# Altium PCB Carte Oeil.PcbDoc
Units mm, origin at the board's own origin, x right, y up, seen from the top; angles counter-clockwise.
Board outline 200 x 200 mm, 2 copper layers (Top Layer, Bottom Layer); 288 components, 75 nets, 674 pads, 16 vias.
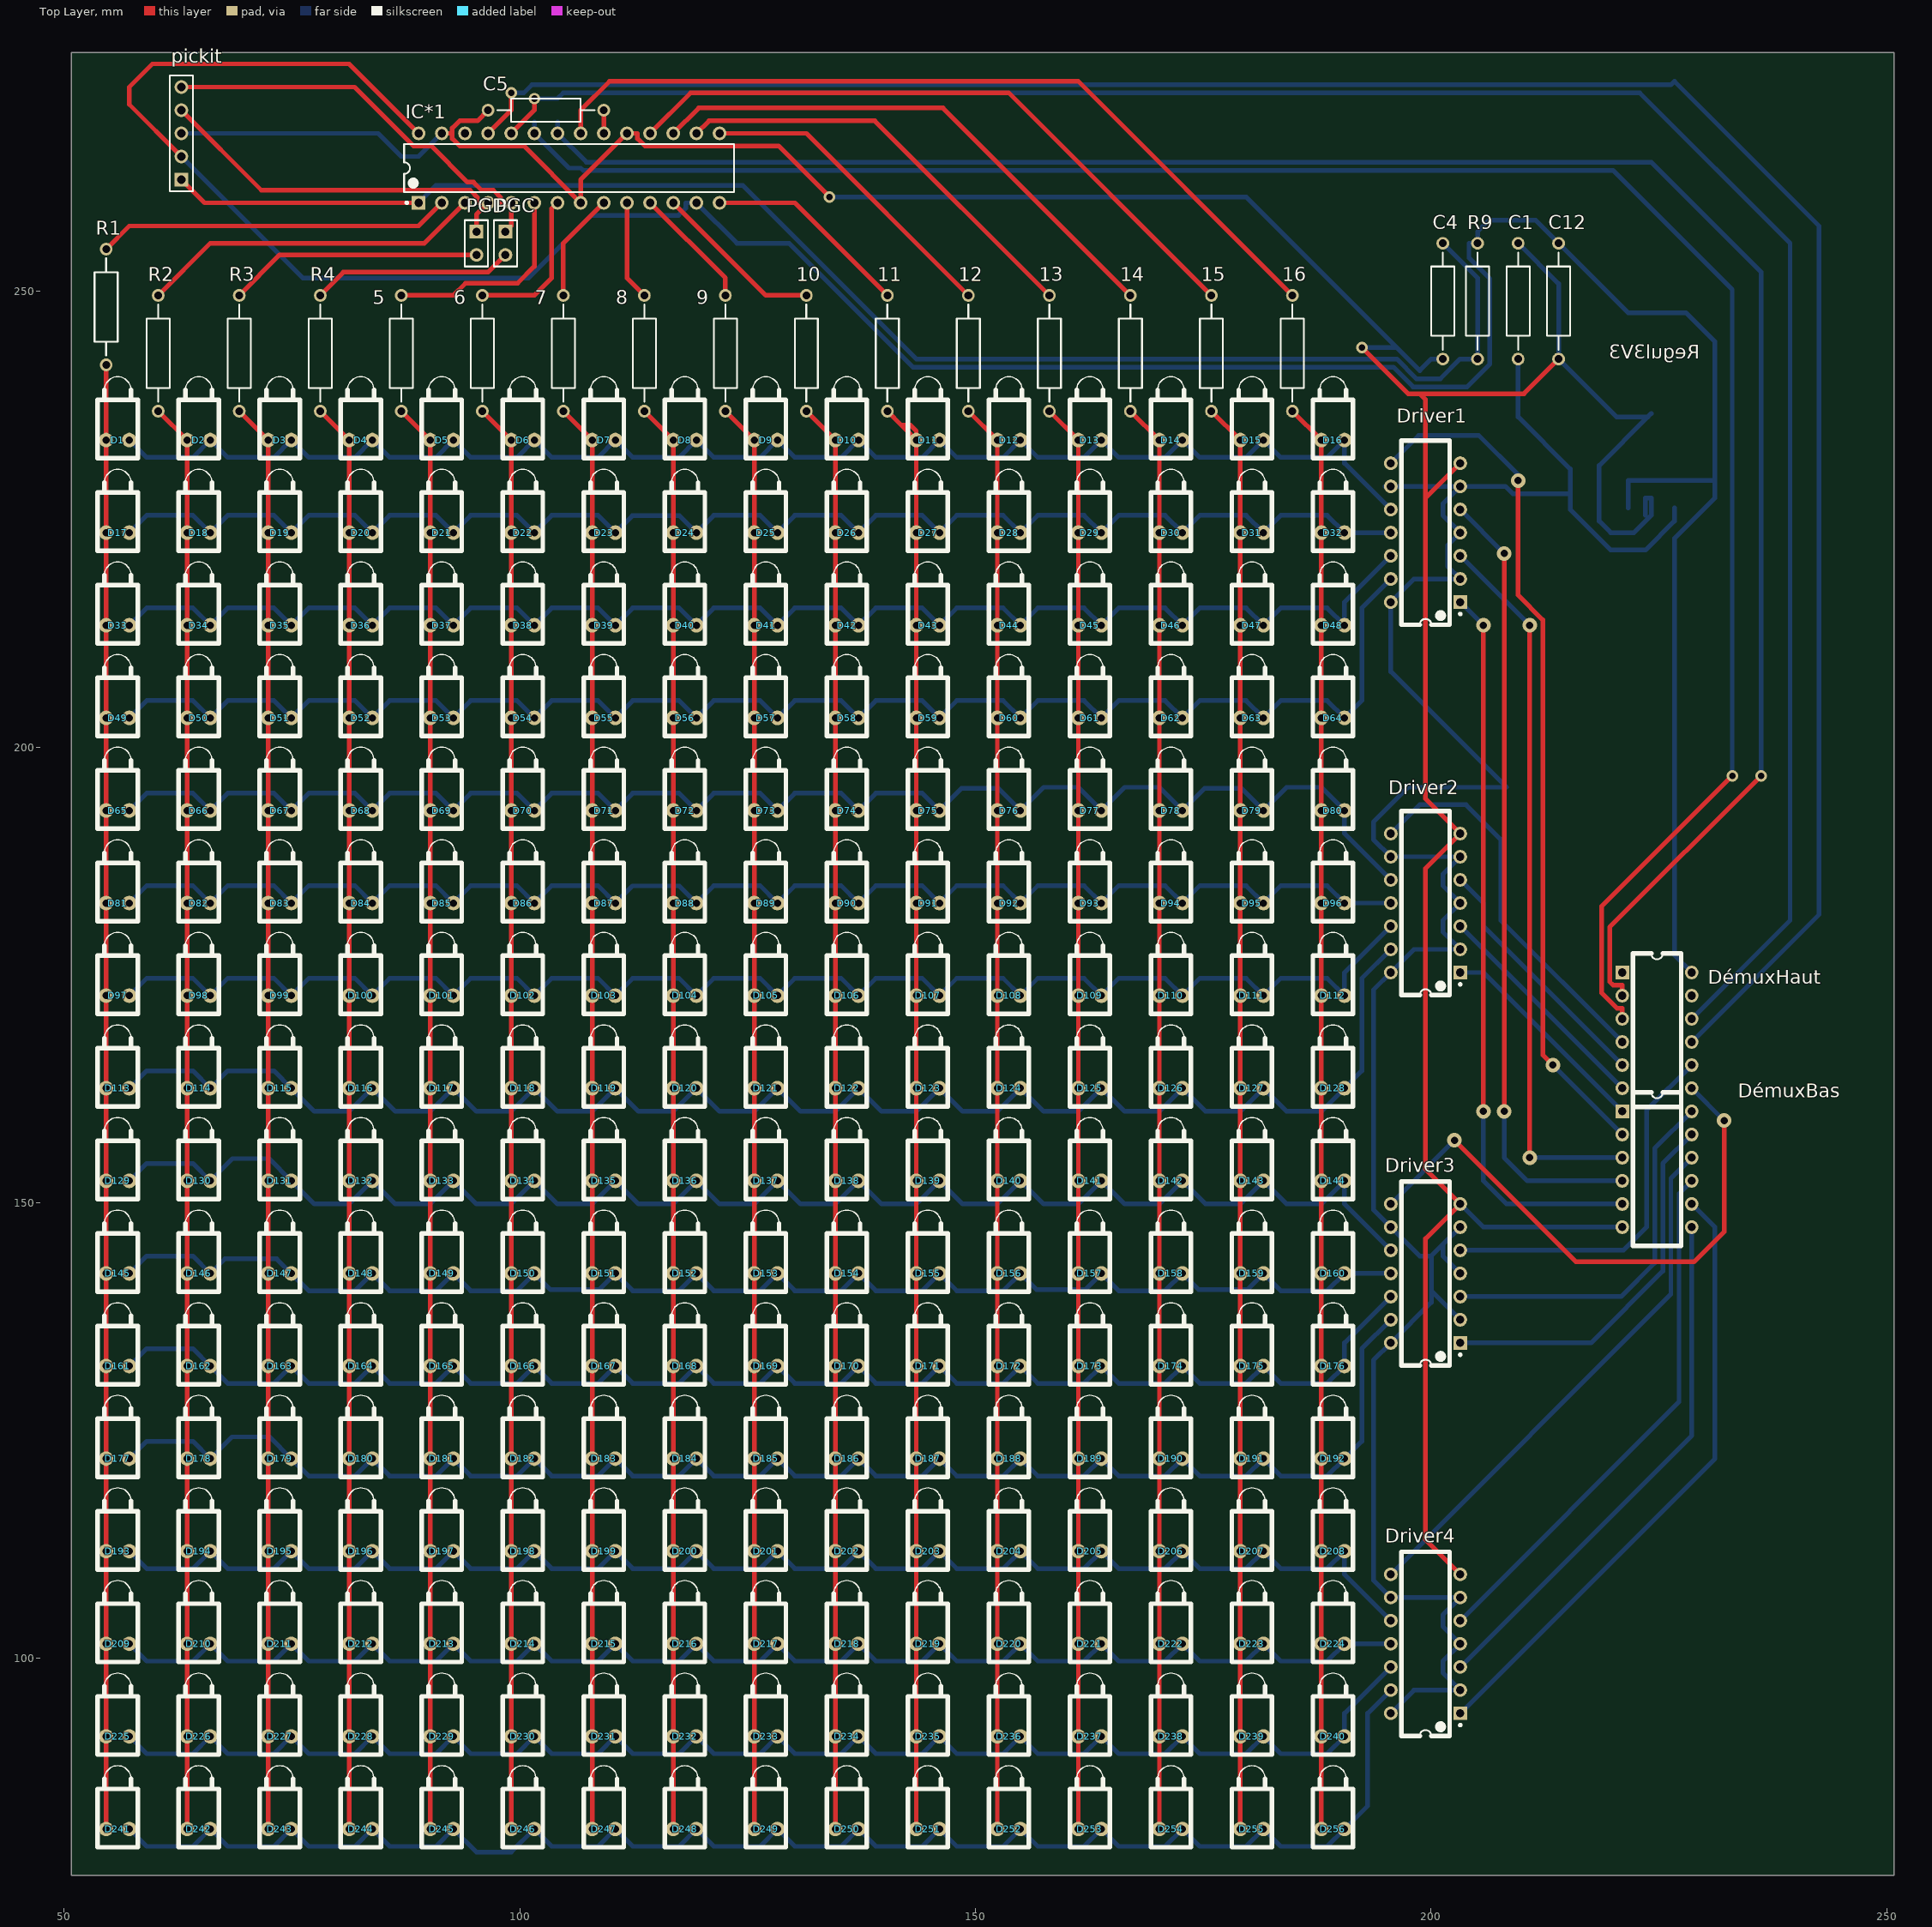
[diagram p0: Top Layer view]
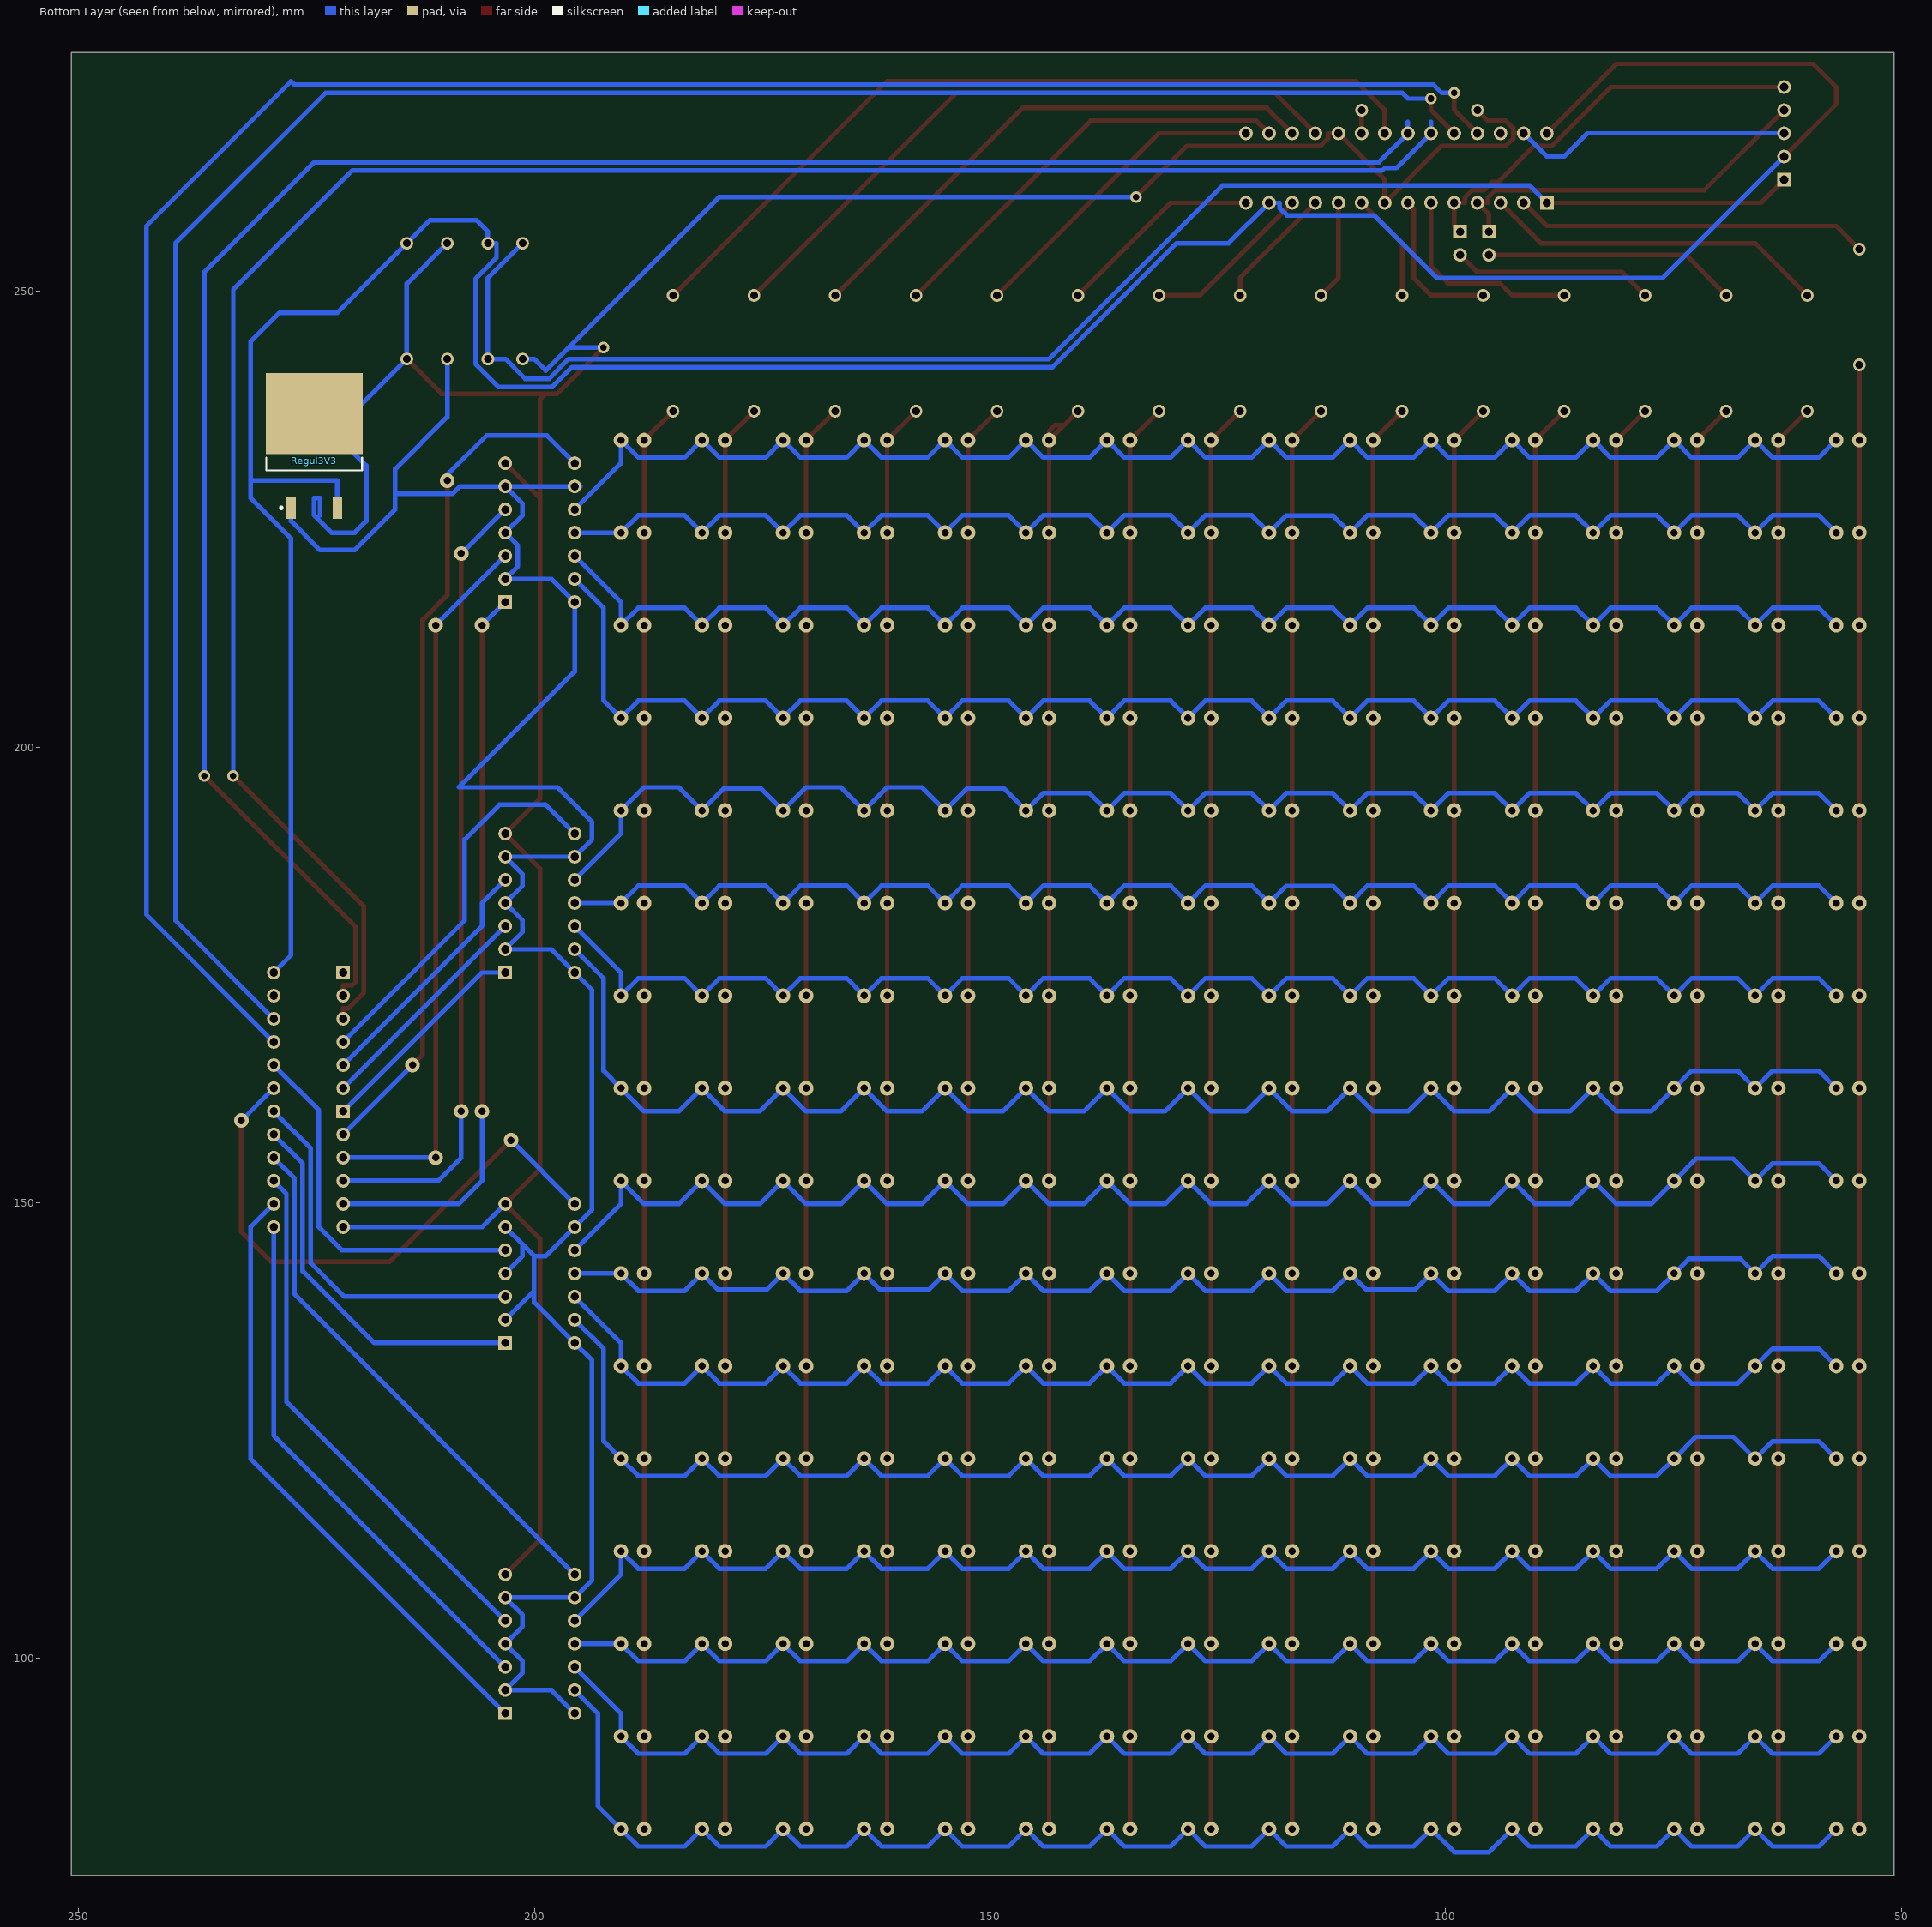
[diagram p1: Bottom Layer view, seen from below]

## Layer stack, top to bottom
Top Solder: solder mask 0.0102, Solder Resist, Dk 3.5
Top Layer: signal copper 0.0356
Dielectric 1: dielectric 0.32, FR-4, Dk 4.8
Bottom Layer: signal copper 0.0356
Bottom Solder: solder mask 0.0102, Solder Resist, Dk 3.5

## Board outline
50.8,76.2 250.8,76.2 250.8,276.2 50.8,276.2

## Design rules (kind name [scope] priority, off if disabled: settings)
Clearance [All] p1: gap=0.381
PolygonConnect [All] p1: connectstyle=Relief reliefconductorwidth=0.254 reliefentries=4 polygonreliefangle="90 Angle" airgapwidth=0.254
RoutingVias [All] p1: holewidth=0.8 width=1.6 viastyle="Through Hole" minholewidth=0.711 minwidth=1.27 maxholewidth=0.711 maxwidth=1.27
SolderMaskExpansion [All] p1: expansion=0.102
UnpouredPolygon [All] p1: allowunpoured=FALSE
Width [All] p1: maxlimit=0.508 minlimit=0.508 preferedwidth=0.508
29 further rules are at their usual default settings.

## Components (designator, comment, footprint, x,y, rotation, side; value= is the part's Value field where it differs from the comment)
5 "1kohm" AXIAL-0.5 86.995,243.205 r90 top
6 "1kohm" AXIAL-0.5 95.885,243.205 r90 top
7 "1kohm" AXIAL-0.5 104.775,243.205 r90 top
8 "1kohm" AXIAL-0.5 113.665,243.205 r90 top
9 "1kohm" AXIAL-0.5 122.555,243.205 r90 top
10 "1kohm" AXIAL-0.5 131.445,243.205 r90 top
11 "1kohm" AXIAL-0.5 140.335,243.205 r90 top
12 "1kohm" AXIAL-0.5 149.225,243.205 r90 top
13 "1kohm" AXIAL-0.5 158.115,243.205 r90 top
14 "1kohm" AXIAL-0.5 167.005,243.205 r90 top
15 "1kohm" AXIAL-0.5 175.895,243.205 r90 top
16 "1kohm" AXIAL-0.5 184.785,243.205 r90 top
C1 "Cap2" AXIAL-0.5 209.55,248.92 r90 top
C4 "100nF" AXIAL-0.5 201.295,248.92 r90 top
C5 "10uF" AXIAL-0.5 102.87,269.875 r180 top
C12 "Cap2" AXIAL-0.5 213.995,248.92 r90 top
D1 "LED1" LED-1 55.88,233.68 r90 top
D2 "LED1" LED-1 64.77,233.68 r90 top
D3 "LED1" LED-1 73.66,233.68 r90 top
D4 "LED1" LED-1 82.55,233.68 r90 top
D5 "LED1" LED-1 91.44,233.68 r90 top
D6 "LED1" LED-1 100.33,233.68 r90 top
D7 "LED1" LED-1 109.22,233.68 r90 top
D8 "LED1" LED-1 118.11,233.68 r90 top
D9 "LED1" LED-1 127,233.68 r90 top
D10 "LED1" LED-1 135.89,233.68 r90 top
D11 "LED1" LED-1 144.78,233.68 r90 top
D12 "LED1" LED-1 153.67,233.68 r90 top
D13 "LED1" LED-1 162.56,233.68 r90 top
D14 "LED1" LED-1 171.45,233.68 r90 top locked
D15 "LED1" LED-1 180.34,233.68 r90 top
D16 "LED1" LED-1 189.23,233.68 r90 top locked
D17 "LED1" LED-1 55.88,223.52 r90 top
D18 "LED1" LED-1 64.77,223.52 r90 top
D19 "LED1" LED-1 73.66,223.52 r90 top
D20 "LED1" LED-1 82.55,223.52 r90 top
D21 "LED1" LED-1 91.44,223.52 r90 top
D22 "LED1" LED-1 100.33,223.52 r90 top
D23 "LED1" LED-1 109.22,223.52 r90 top
D24 "LED1" LED-1 118.11,223.52 r90 top
D25 "LED1" LED-1 127,223.52 r90 top
D26 "LED1" LED-1 135.89,223.52 r90 top
D27 "LED1" LED-1 144.78,223.52 r90 top
D28 "LED1" LED-1 153.67,223.52 r90 top
D29 "LED1" LED-1 162.56,223.52 r90 top
D30 "LED1" LED-1 171.45,223.52 r90 top
D31 "LED1" LED-1 180.34,223.52 r90 top locked
D32 "LED1" LED-1 189.23,223.52 r90 top
D33 "LED1" LED-1 55.88,213.36 r90 top
D34 "LED1" LED-1 64.77,213.36 r90 top
D35 "LED1" LED-1 73.66,213.36 r90 top
D36 "LED1" LED-1 82.55,213.36 r90 top
D37 "LED1" LED-1 91.44,213.36 r90 top
D38 "LED1" LED-1 100.33,213.36 r90 top
D39 "LED1" LED-1 109.22,213.36 r90 top
D40 "LED1" LED-1 118.11,213.36 r90 top
D41 "LED1" LED-1 127,213.36 r90 top
D42 "LED1" LED-1 135.89,213.36 r90 top
D43 "LED1" LED-1 144.78,213.36 r90 top
D44 "LED1" LED-1 153.67,213.36 r90 top
D45 "LED1" LED-1 162.56,213.36 r90 top
D46 "LED1" LED-1 171.45,213.36 r90 top
D47 "LED1" LED-1 180.34,213.36 r90 top
D48 "LED1" LED-1 189.23,213.36 r90 top
D49 "LED1" LED-1 55.88,203.2 r90 top
D50 "LED1" LED-1 64.77,203.2 r90 top
D51 "LED1" LED-1 73.66,203.2 r90 top
D52 "LED1" LED-1 82.55,203.2 r90 top
D53 "LED1" LED-1 91.44,203.2 r90 top
D54 "LED1" LED-1 100.33,203.2 r90 top
D55 "LED1" LED-1 109.22,203.2 r90 top
D56 "LED1" LED-1 118.11,203.2 r90 top
D57 "LED1" LED-1 127,203.2 r90 top
D58 "LED1" LED-1 135.89,203.2 r90 top
D59 "LED1" LED-1 144.78,203.2 r90 top
D60 "LED1" LED-1 153.67,203.2 r90 top
D61 "LED1" LED-1 162.56,203.2 r90 top
D62 "LED1" LED-1 171.45,203.2 r90 top
D63 "LED1" LED-1 180.34,203.2 r90 top
D64 "LED1" LED-1 189.23,203.2 r90 top
D65 "LED1" LED-1 55.88,193.04 r90 top
D66 "LED1" LED-1 64.77,193.04 r90 top
D67 "LED1" LED-1 73.66,193.04 r90 top
D68 "LED1" LED-1 82.55,193.04 r90 top
D69 "LED1" LED-1 91.44,193.04 r90 top
D70 "LED1" LED-1 100.33,193.04 r90 top
D71 "LED1" LED-1 109.22,193.04 r90 top
D72 "LED1" LED-1 118.11,193.04 r90 top
D73 "LED1" LED-1 127,193.04 r90 top
D74 "LED1" LED-1 135.89,193.04 r90 top
D75 "LED1" LED-1 144.78,193.04 r90 top
D76 "LED1" LED-1 153.67,193.04 r90 top
D77 "LED1" LED-1 162.56,193.04 r90 top
D78 "LED1" LED-1 171.45,193.04 r90 top
D79 "LED1" LED-1 180.34,193.04 r90 top
D80 "LED1" LED-1 189.23,193.04 r90 top
D81 "LED1" LED-1 55.88,182.88 r90 top
D82 "LED1" LED-1 64.77,182.88 r90 top
D83 "LED1" LED-1 73.66,182.88 r90 top
D84 "LED1" LED-1 82.55,182.88 r90 top
D85 "LED1" LED-1 91.44,182.88 r90 top
D86 "LED1" LED-1 100.33,182.88 r90 top
D87 "LED1" LED-1 109.22,182.88 r90 top
D88 "LED1" LED-1 118.11,182.88 r90 top
D89 "LED1" LED-1 127,182.88 r90 top
D90 "LED1" LED-1 135.89,182.88 r90 top
D91 "LED1" LED-1 144.78,182.88 r90 top
D92 "LED1" LED-1 153.67,182.88 r90 top
D93 "LED1" LED-1 162.56,182.88 r90 top
D94 "LED1" LED-1 171.45,182.88 r90 top
D95 "LED1" LED-1 180.34,182.88 r90 top
D96 "LED1" LED-1 189.23,182.88 r90 top
D97 "LED1" LED-1 55.88,172.72 r90 top
D98 "LED1" LED-1 64.77,172.72 r90 top
D99 "LED1" LED-1 73.66,172.72 r90 top
D100 "LED1" LED-1 82.55,172.72 r90 top
D101 "LED1" LED-1 91.44,172.72 r90 top
D102 "LED1" LED-1 100.33,172.72 r90 top
D103 "LED1" LED-1 109.22,172.72 r90 top
D104 "LED1" LED-1 118.11,172.72 r90 top
D105 "LED1" LED-1 127,172.72 r90 top
D106 "LED1" LED-1 135.89,172.72 r90 top
D107 "LED1" LED-1 144.78,172.72 r90 top
D108 "LED1" LED-1 153.67,172.72 r90 top
D109 "LED1" LED-1 162.56,172.72 r90 top
D110 "LED1" LED-1 171.45,172.72 r90 top
D111 "LED1" LED-1 180.34,172.72 r90 top
D112 "LED1" LED-1 189.23,172.72 r90 top
D113 "LED1" LED-1 55.88,162.56 r90 top
D114 "LED1" LED-1 64.77,162.56 r90 top
D115 "LED1" LED-1 73.66,162.56 r90 top
D116 "LED1" LED-1 82.55,162.56 r90 top
D117 "LED1" LED-1 91.44,162.56 r90 top
D118 "LED1" LED-1 100.33,162.56 r90 top
D119 "LED1" LED-1 109.22,162.56 r90 top
D120 "LED1" LED-1 118.11,162.56 r90 top
D121 "LED1" LED-1 127,162.56 r90 top
D122 "LED1" LED-1 135.89,162.56 r90 top
D123 "LED1" LED-1 144.78,162.56 r90 top
D124 "LED1" LED-1 153.67,162.56 r90 top
D125 "LED1" LED-1 162.56,162.56 r90 top
D126 "LED1" LED-1 171.45,162.56 r90 top
D127 "LED1" LED-1 180.34,162.56 r90 top
D128 "LED1" LED-1 189.23,162.56 r90 top
D129 "LED1" LED-1 55.88,152.4 r90 top
D130 "LED1" LED-1 64.77,152.4 r90 top
D131 "LED1" LED-1 73.66,152.4 r90 top
D132 "LED1" LED-1 82.55,152.4 r90 top
D133 "LED1" LED-1 91.44,152.4 r90 top
D134 "LED1" LED-1 100.33,152.4 r90 top
D135 "LED1" LED-1 109.22,152.4 r90 top
D136 "LED1" LED-1 118.11,152.4 r90 top
D137 "LED1" LED-1 127,152.4 r90 top
D138 "LED1" LED-1 135.89,152.4 r90 top
D139 "LED1" LED-1 144.78,152.4 r90 top
D140 "LED1" LED-1 153.67,152.4 r90 top
D141 "LED1" LED-1 162.56,152.4 r90 top
D142 "LED1" LED-1 171.45,152.4 r90 top
D143 "LED1" LED-1 180.34,152.4 r90 top
D144 "LED1" LED-1 189.23,152.4 r90 top
D145 "LED1" LED-1 55.88,142.24 r90 top
D146 "LED1" LED-1 64.77,142.24 r90 top
D147 "LED1" LED-1 73.66,142.24 r90 top
D148 "LED1" LED-1 82.55,142.24 r90 top
D149 "LED1" LED-1 91.44,142.24 r90 top
D150 "LED1" LED-1 100.33,142.24 r90 top
D151 "LED1" LED-1 109.22,142.24 r90 top
D152 "LED1" LED-1 118.11,142.24 r90 top
D153 "LED1" LED-1 127,142.24 r90 top
D154 "LED1" LED-1 135.89,142.24 r90 top
D155 "LED1" LED-1 144.78,142.24 r90 top
D156 "LED1" LED-1 153.67,142.24 r90 top
D157 "LED1" LED-1 162.56,142.24 r90 top
D158 "LED1" LED-1 171.45,142.24 r90 top
D159 "LED1" LED-1 180.34,142.24 r90 top
D160 "LED1" LED-1 189.23,142.24 r90 top
D161 "LED1" LED-1 55.88,132.08 r90 top
D162 "LED1" LED-1 64.77,132.08 r90 top
D163 "LED1" LED-1 73.66,132.08 r90 top
D164 "LED1" LED-1 82.55,132.08 r90 top
D165 "LED1" LED-1 91.44,132.08 r90 top
D166 "LED1" LED-1 100.33,132.08 r90 top
D167 "LED1" LED-1 109.22,132.08 r90 top
D168 "LED1" LED-1 118.11,132.08 r90 top
D169 "LED1" LED-1 127,132.08 r90 top
D170 "LED1" LED-1 135.89,132.08 r90 top
D171 "LED1" LED-1 144.78,132.08 r90 top
D172 "LED1" LED-1 153.67,132.08 r90 top
D173 "LED1" LED-1 162.56,132.08 r90 top
D174 "LED1" LED-1 171.45,132.08 r90 top
D175 "LED1" LED-1 180.34,132.08 r90 top
D176 "LED1" LED-1 189.23,132.08 r90 top
D177 "LED1" LED-1 55.88,121.92 r90 top
D178 "LED1" LED-1 64.77,121.92 r90 top
D179 "LED1" LED-1 73.66,121.92 r90 top
D180 "LED1" LED-1 82.55,121.92 r90 top
D181 "LED1" LED-1 91.44,121.92 r90 top
D182 "LED1" LED-1 100.33,121.92 r90 top
D183 "LED1" LED-1 109.22,121.92 r90 top
D184 "LED1" LED-1 118.11,121.92 r90 top
D185 "LED1" LED-1 127,121.92 r90 top
D186 "LED1" LED-1 135.89,121.92 r90 top
D187 "LED1" LED-1 144.78,121.92 r90 top
D188 "LED1" LED-1 153.67,121.92 r90 top
D189 "LED1" LED-1 162.56,121.92 r90 top
D190 "LED1" LED-1 171.45,121.92 r90 top
D191 "LED1" LED-1 180.34,121.92 r90 top
D192 "LED1" LED-1 189.23,121.92 r90 top
D193 "LED1" LED-1 55.88,111.76 r90 top
D194 "LED1" LED-1 64.77,111.76 r90 top
D195 "LED1" LED-1 73.66,111.76 r90 top
D196 "LED1" LED-1 82.55,111.76 r90 top
D197 "LED1" LED-1 91.44,111.76 r90 top
D198 "LED1" LED-1 100.33,111.76 r90 top
D199 "LED1" LED-1 109.22,111.76 r90 top
D200 "LED1" LED-1 118.11,111.76 r90 top
D201 "LED1" LED-1 127,111.76 r90 top
D202 "LED1" LED-1 135.89,111.76 r90 top
D203 "LED1" LED-1 144.78,111.76 r90 top
D204 "LED1" LED-1 153.67,111.76 r90 top
D205 "LED1" LED-1 162.56,111.76 r90 top
D206 "LED1" LED-1 171.45,111.76 r90 top
D207 "LED1" LED-1 180.34,111.76 r90 top
D208 "LED1" LED-1 189.23,111.76 r90 top
D209 "LED1" LED-1 55.88,101.6 r90 top
D210 "LED1" LED-1 64.77,101.6 r90 top
D211 "LED1" LED-1 73.66,101.6 r90 top
D212 "LED1" LED-1 82.55,101.6 r90 top
D213 "LED1" LED-1 91.44,101.6 r90 top
D214 "LED1" LED-1 100.33,101.6 r90 top
D215 "LED1" LED-1 109.22,101.6 r90 top
D216 "LED1" LED-1 118.11,101.6 r90 top
D217 "LED1" LED-1 127,101.6 r90 top
D218 "LED1" LED-1 135.89,101.6 r90 top
D219 "LED1" LED-1 144.78,101.6 r90 top
D220 "LED1" LED-1 153.67,101.6 r90 top
D221 "LED1" LED-1 162.56,101.6 r90 top
D222 "LED1" LED-1 171.45,101.6 r90 top
D223 "LED1" LED-1 180.34,101.6 r90 top
D224 "LED1" LED-1 189.23,101.6 r90 top
D225 "LED1" LED-1 55.88,91.44 r90 top
D226 "LED1" LED-1 64.77,91.44 r90 top
D227 "LED1" LED-1 73.66,91.44 r90 top
D228 "LED1" LED-1 82.55,91.44 r90 top
D229 "LED1" LED-1 91.44,91.44 r90 top
D230 "LED1" LED-1 100.33,91.44 r90 top
D231 "LED1" LED-1 109.22,91.44 r90 top
D232 "LED1" LED-1 118.11,91.44 r90 top
D233 "LED1" LED-1 127,91.44 r90 top
D234 "LED1" LED-1 135.89,91.44 r90 top
D235 "LED1" LED-1 144.78,91.44 r90 top
D236 "LED1" LED-1 153.67,91.44 r90 top
D237 "LED1" LED-1 162.56,91.44 r90 top
D238 "LED1" LED-1 171.45,91.44 r90 top
D239 "LED1" LED-1 180.34,91.44 r90 top
D240 "LED1" LED-1 189.23,91.44 r90 top
D241 "LED1" LED-1 55.88,81.28 r90 top
D242 "LED1" LED-1 64.77,81.28 r90 top
D243 "LED1" LED-1 73.66,81.28 r90 top
D244 "LED1" LED-1 82.55,81.28 r90 top
D245 "LED1" LED-1 91.44,81.28 r90 top
D246 "LED1" LED-1 100.33,81.28 r90 top
D247 "LED1" LED-1 109.22,81.28 r90 top
D248 "LED1" LED-1 118.11,81.28 r90 top
D249 "LED1" LED-1 127,81.28 r90 top
D250 "LED1" LED-1 135.89,81.28 r90 top
D251 "LED1" LED-1 144.78,81.28 r90 top
D252 "LED1" LED-1 153.67,81.28 r90 top
D253 "LED1" LED-1 162.56,81.28 r90 top
D254 "LED1" LED-1 171.45,81.28 r90 top
D255 "LED1" LED-1 180.34,81.28 r90 top
D256 "LED1" LED-1 189.23,81.28 r90 top
Driver1 "SW DIP-7" DIP-14 199.39,223.52 r180 top
Driver2 "SW DIP-7" DIP-14 199.39,182.88 r180 top
Driver3 "SW DIP-7" DIP-14 199.39,142.24 r180 top
Driver4 "SW DIP-7" DIP-14 199.39,101.6 r180 top
DémuxBas "SW DIP-6" DIP-12/SW 224.79,153.67 r270 top
DémuxHaut "SW DIP-6" DIP-12/SW 224.79,168.91 r270 top
IC*1 "dsPIC33FJ128MC802" SPDIP300-SP28 105.41,263.525 r90 top
PGC "Header 2" HDR1X2 98.425,256.54 r270 top
PGD "Header 2" HDR1X2 95.25,256.54 r270 top
pickit "pickit3" HDR1X5 62.865,262.255 r90 top
R1 "1kohm" AXIAL-0.5 54.61,248.285 r90 top
R2 "1kohm" AXIAL-0.5 60.325,243.205 r90 top
R3 "1kohm" AXIAL-0.5 69.215,243.205 r90 top
R4 "1kohm" AXIAL-0.5 78.105,243.205 r90 top
R9 "10kohm" AXIAL-0.5 205.105,248.92 r90 top
Regul3V3 "Bornier_3" D2PAK_N 224.155,233.045 r90 bottom

## Footprints (in the part's own frame and the unit in brackets; to place one, negate y for a bottom-side part, rotate by r counter-clockwise, add the part's x,y. Pads: shape width x height; smd on the part's side, far side on the other; paste and mask are expansions set on the pad)
AXIAL-0.5 [mm] "Axial Device, Thru-Hole; 2 Leads; 0.5 in Pin Spacing"
  round 1.4 hole 0.85: 1(-6.35,0) 2(6.35,0)
  silkscreen extent -5.33,-1.27 5.33,1.27
D2PAK_N [mm] "D2-PAK, 4-Leads, Body 8.8x10.4mm, Pitch 2.54mm, Lead Span 15.1mm, IPC Medium Density"
  rect 2.4x1.05 smd: 1(-6.8,2.54) 3(-6.8,-2.54)
  rect 8.9x10.65 smd: 2(3.55,0)
  silkscreen extent -6.92,-5.25 -1.3,5.25, body extent -2.7,-5.28 6.3,5.28, height 4.69
DIP-12/SW [mm] "DIP Switch; 12 Leads"
  rect 1.5x1.5 hole 0.9: 1(-6.35,-3.81)
  round 1.5 hole 0.9: 2(-3.81,-3.81) 3(-1.27,-3.81) 4(1.27,-3.81) 5(3.81,-3.81) 6(6.35,-3.81) 7(6.35,3.81) 8(3.81,3.81) 9(1.27,3.81) 10(-1.27,3.81) 11(-3.81,3.81) 12(-6.35,3.81)
  silkscreen extent -8.43,-2.65 8.41,2.65
DIP-14 [mm] "DIP; 14 Leads; Row Spacing 7.62 mm; Pitch 2.54 mm"
  rect 1.5x1.5 hole 0.9: 1(-3.81,7.62)
  round 1.5 hole 0.9: 2(-3.81,5.08) 3(-3.81,2.54) 4(-3.81,0) 5(-3.81,-2.54) 6(-3.81,-5.08) 7(-3.81,-7.62) 8(3.81,-7.62) 9(3.81,-5.08) 10(3.81,-2.54) 11(3.81,0) 12(3.81,2.54) 13(3.81,5.08) 14(3.81,7.62)
  silkscreen extent -3.94,-10.1 2.65,10.1, body extent -3.6,-10.1 3.6,10.1, height 5.08
HDR1X2 [mm] "Connector; Header; 2 Position"
  rect 1.5x1.5 hole 0.9: 1(0,0)
  round 1.5 hole 0.9: 2(2.54,0)
  silkscreen extent -1.27,-1.27 3.81,1.27
HDR1X5 [mm] "Connector; Header; 5 Position"
  rect 1.5x1.5 hole 0.9: 1(0,0)
  round 1.5 hole 0.9: 2(2.54,0) 3(5.08,0) 4(7.62,0) 5(10.16,0)
  silkscreen extent -1.27,-1.27 11.43,1.27
LED-1 [mm] "LED; 2 Leads"
  round 1.6 hole 0.8: 1(0,1.27) 2(0,-1.27)
  silkscreen extent -2,-2.2 6.95,2.2
SPDIP300-SP28 [mm] "DIP, 28-Leads, Row Spacing 7.62mm, Pitch 2.54mm, Body 34.9x6.8mm"
  rect 1.5x1.5 hole 0.9: 1(-3.81,16.51)
  round 1.5 hole 0.9: 2(-3.81,13.97) 3(-3.81,11.43) 4(-3.81,8.89) 5(-3.81,6.35) 6(-3.81,3.81) 7(-3.81,1.27) 8(-3.81,-1.27) 9(-3.81,-3.81) 10(-3.81,-6.35) 11(-3.81,-8.89) 12(-3.81,-11.43) 13(-3.81,-13.97) 14(-3.81,-16.51) 15(3.81,-16.51) 16(3.81,-13.97) 17(3.81,-11.43) 18(3.81,-8.89) 19(3.81,-6.35) 20(3.81,-3.81) 21(3.81,-1.27) 22(3.81,1.27) 23(3.81,3.81) 24(3.81,6.35) 25(3.81,8.89) 26(3.81,11.43) 27(3.81,13.97) 28(3.81,16.51)
  silkscreen extent -3.93,-18.1 2.65,18.1, body extent -3.55,-18.1 3.55,18.1, height 5.08

## Part data
5 6 7 8 9 10 11 12 13 14 15 16 R1 R2 R3 R4 R9: library part Resistance
C1 C12: "Capacitor"
C4: library part Capa
C5: library part "Capa Pol"
D1 D2 D3 D4 D5 D6 D7 D8 D9 D10 D11 D12 D13 D14 D15 D16 D17 D18 D19 D20 D21 D22 D23 D24 D25 D26 D27 D28 D29 D30 D31 D32 D33 D34 D35 D36 D37 D38 D39 D40 D41 D42 D43 D44 D45 D46 D47 D48 D49 D50 D51 D52 D53 D54 D55 D56 D57 D58 D59 D60 D61 D62 D63 D64 D65 D66 D67 D68 D69 D70 D71 D72 D73 D74 D75 D76 D77 D78 D79 D80 D81 D82 D83 D84 D85 D86 D87 D88 D89 D90 D91 D92 D93 D94 D95 D96 D97 D98 D99 D100 D101 D102 D103 D104 D105 D106 D107 D108 D109 D110 D111 D112 D113 D114 D115 D116 D117 D118 D119 D120 D121 D122 D123 D124 D125 D126 D127 D128 D129 D130 D131 D132 D133 D134 D135 D136 D137 D138 D139 D140 D141 D142 D143 D144 D145 D146 D147 D148 D149 D150 D151 D152 D153 D154 D155 D156 D157 D158 D159 D160 D161 D162 D163 D164 D165 D166 D167 D168 D169 D170 D171 D172 D173 D174 D175 D176 D177 D178 D179 D180 D181 D182 D183 D184 D185 D186 D187 D188 D189 D190 D191 D192 D193 D194 D195 D196 D197 D198 D199 D200 D201 D202 D203 D204 D205 D206 D207 D208 D209 D210 D211 D212 D213 D214 D215 D216 D217 D218 D219 D220 D221 D222 D223 D224 D225 D226 D227 D228 D229 D230 D231 D232 D233 D234 D235 D236 D237 D238 D239 D240 D241 D242 D243 D244 D245 D246 D247 D248 D249 D250 D251 D252 D253 D254 D255 D256: "Typical RED GaAs LED"
Driver1 Driver2 Driver3 Driver4: "DIP Switch, 7 Position, SPST"
DémuxBas DémuxHaut: "DIP Switch, 6 Position, SPST"
PGC PGD: "Header, 2-Pin"
Regul3V3: "Header, 3-Pin"

## Via types
v1: diameter 1.6, hole 0.8, Top Layer to Bottom Layer, 10 vias
v2: diameter 1.27, hole 0.711, Top Layer to Bottom Layer, 6 vias

## Nets (pads, with @x,y where several pads share a name; then routed paths per layer and width w, separated by ;. In a path a pad name is that pad's centre, name@x,y a point inside that pad or via, vN(x,y) a via of type N, cw(c..) or ccw(c..) an arc to the next point about the centre after c; other vN are vias at no path point)
3.3V: C12.2 DémuxHaut.12 IC*1.13 IC*1.28 pickit.2 R9.2 Regul3V3.3 | length 341.1
  Top Layer w0.508: pickit.2 57.15,270.51 57.15,272.415 59.69,274.955 81.28,274.955 IC*1.28
  Bottom Layer w0.508: pickit.2 76.2,251.46 100.965,251.46 107.835,258.33 117.414,258.33 118.225,259.141 118.225,259.715 IC*1.13 123.825,255.27 129.553,255.27 143.142,241.681 195.86,241.681 198.019,239.522 203.945,239.522 206.44,242.017 206.44,251.382 204.151,253.671 204.151,255.27 R9.2 205.105,256.54 206.375,257.81 211.455,257.81 C12.2 221.615,247.65 227.965,247.65 231.14,244.475 231.14,229.235 ; Regul3V3.3 221.615,229.235 231.14,229.235 ; DémuxHaut.12 226.695,177.165 226.695,222.885 231.14,227.33 231.14,229.235
5V: C1.1 Driver1.2 Driver1.4 Driver1.6 Driver1.9 Driver1.14 Driver2.2 Driver2.4 Driver2.6 Driver2.9 Driver2.14 Driver3.2 Driver3.4 Driver3.6 Driver3.9 Driver3.14 Driver4.2 Driver4.4 Driver4.6 Driver4.9 Driver4.14 Regul3V3.1 | length 271.8
  Bottom Layer w0.508: Driver1.9@194.945,228.6 Driver1.9 Driver1.6 ; Driver4.14 198.12,96.52 Driver4.2 201.295,98.425 201.295,99.695 Driver4.4 201.295,103.505 201.295,104.775 Driver4.6 Driver4.9 193.675,108.585 193.675,132.715 Driver3.14 200.025,139.065 200.025,140.335 ; Driver3.2 200.025,140.335 ; Driver3.4 201.295,144.145 201.295,145.415 ; Driver3.6 201.295,145.415 ; C1.1 209.55,236.22 215.265,230.505 215.265,227.8 ; Regul3V3.1 226.695,224.79 223.52,221.615 219.71,221.615 215.265,226.06 215.265,227.8 ; 200.025,140.335 200.025,144.145 ; 200.025,144.145 201.295,145.415 ; 200.025,144.145 198.755,144.145 Driver3.9 193.675,149.225 193.675,173.355 Driver2.14 198.12,177.8 Driver2.2 201.295,179.705 201.295,180.975 Driver2.4 201.295,184.785 201.295,186.055 Driver2.6 Driver2.9 193.675,189.865 193.675,191.77 197.485,195.58 208.28,195.58 195.58,208.28 Driver1.14 198.12,218.44 Driver1.2 201.815,219.825 201.815,222.135 Driver1.4 201.295,225.425 201.295,226.695 Driver1.6 ; Driver1.6 208.156,228.6 208.956,227.8 215.265,227.8
GND: C1.2 C4.1 C5.2 C12.1 Driver1.7 Driver2.7 Driver3.7 Driver4.7 DémuxBas.6 IC*1.8 IC*1.19 IC*1.27 pickit.3 Regul3V3.2 | length 409.2
  Top Layer w0.508: IC*1.27 92.595,267.335 ; C5.2 95.365,268.72 93.406,268.72 92.595,267.909 92.595,267.335 ; v2(133.985,260.35) 128.385,265.95 113.726,265.95 112.915,266.761 112.915,267.335 IC*1.19 106.68,262.255 IC*1.8 100.445,265.95 93.406,265.95 92.595,266.761 92.595,267.335 ; v2(192.405,243.84) 197.485,238.76 198.755,238.76 ; Driver4.7 199.39,113.03 199.39,146.05 Driver3.7 199.39,153.67 199.39,186.69 Driver2.7 199.39,194.31 199.39,227.33 ; Driver1.7 199.39,227.33 ; C12.1 210.185,238.76 198.755,238.76 ; 198.755,238.76 199.39,238.125 199.39,227.33
  Bottom Layer w0.508: pickit.3 84.455,267.335 86.995,264.795 88.9,264.795 IC*1.27 ; v2(133.985,260.35) 179.705,260.35 196.215,243.84 ; v2(192.405,243.84) 196.215,243.84 ; C4.1 200.025,242.57 198.755,241.3 196.215,243.84 ; Driver3.7 205.74,147.32 DémuxBas.6 ; C1.2 213.995,250.825 C12.1 220.345,236.22 Regul3V3.2@223.78,236.22 ; 223.52,225.425 223.52,227.33 224.155,227.33 224.155,225.425 222.25,223.52 219.71,223.52 218.44,224.79 218.44,230.88 Regul3V3.2@223.78,236.22 ; Regul3V3.2 Regul3V3.2@223.78,236.22
MCLR: C4.2 IC*1.1 pickit.1 R9.1 | length 168
  Top Layer w0.508: pickit.1 65.405,259.715 IC*1.1
  Bottom Layer w0.508: IC*1.1 90.805,261.62 124.46,261.62 143.51,242.57 196.228,242.57 198.387,240.411 201.024,240.411 203.183,242.57 R9.1 205.105,251.46 C4.2
Net5_1: 5.1 D5.1 D21.1 D37.1 D53.1 D69.1 D85.1 D101.1 D117.1 D133.1 D149.1 D165.1 D181.1 D197.1 D213.1 D229.1 D245.1 | length 156.9
  Top Layer w0.508: 5.1 D5.1 D21.1 D37.1 D53.1 D69.1 D85.1 D101.1 D117.1 D133.1 D149.1 D165.1 D181.1 D197.1 D213.1 D229.1 D245.1
Net6_1: 6.1 D6.1 D22.1 D38.1 D54.1 D70.1 D86.1 D102.1 D118.1 D134.1 D150.1 D166.1 D182.1 D198.1 D214.1 D230.1 D246.1 | length 156.9
  Top Layer w0.508: 6.1 D6.1 D22.1 D38.1 D54.1 D70.1 D86.1 D102.1 D118.1 D134.1 D150.1 D166.1 D182.1 D198.1 D214.1 D230.1 D246.1
Net7_1: 7.1 D7.1 D23.1 D39.1 D55.1 D71.1 D87.1 D103.1 D119.1 D135.1 D151.1 D167.1 D183.1 D199.1 D215.1 D231.1 D247.1 | length 156.9
  Top Layer w0.508: 7.1 D7.1 D23.1 D39.1 D55.1 D71.1 D87.1 D103.1 D119.1 D135.1 D151.1 D167.1 D183.1 D199.1 D215.1 D231.1 D247.1
Net8_1: 8.1 D8.1 D24.1 D40.1 D56.1 D72.1 D88.1 D104.1 D120.1 D136.1 D152.1 D168.1 D184.1 D200.1 D216.1 D232.1 D248.1 | length 156.9
  Top Layer w0.508: 8.1 D8.1 D24.1 D40.1 D56.1 D72.1 D88.1 D104.1 D120.1 D136.1 D152.1 D168.1 D184.1 D200.1 D216.1 D232.1 D248.1
Net9_1: 9.1 D9.1 D25.1 D41.1 D57.1 D73.1 D89.1 D105.1 D121.1 D137.1 D153.1 D169.1 D185.1 D201.1 D217.1 D233.1 D249.1 | length 156.9
  Top Layer w0.508: 9.1 D9.1 D25.1 D41.1 D57.1 D73.1 D89.1 D105.1 D121.1 D137.1 D153.1 D169.1 D185.1 D201.1 D217.1 D233.1 D249.1
Net10_1: 10.1 D10.1 D26.1 D42.1 D58.1 D74.1 D90.1 D106.1 D122.1 D138.1 D154.1 D170.1 D186.1 D202.1 D218.1 D234.1 D250.1 | length 156.9
  Top Layer w0.508: 10.1 D10.1 D26.1 D42.1 D58.1 D74.1 D90.1 D106.1 D122.1 D138.1 D154.1 D170.1 D186.1 D202.1 D218.1 D234.1 D250.1
Net11_1: 11.1 D11.1 D27.1 D43.1 D59.1 D75.1 D91.1 D107.1 D123.1 D139.1 D155.1 D171.1 D187.1 D203.1 D219.1 D235.1 D251.1 | length 158.9
  Top Layer w0.508: 11.1 141.884,235.306 ; 142.875,234.315 141.884,235.306 ; D251.1 D235.1 D219.1 D203.1 D187.1 D171.1 D155.1 D139.1 D123.1 D107.1 D91.1 D75.1 D59.1 D43.1 D27.1 D11.1 143.51,234.671 142.875,235.306 141.884,235.306
Net12_1: 12.1 D12.1 D28.1 D44.1 D60.1 D76.1 D92.1 D108.1 D124.1 D140.1 D156.1 D172.1 D188.1 D204.1 D220.1 D236.1 D252.1 | length 156.9
  Top Layer w0.508: 12.1 D12.1 D28.1 D44.1 D60.1 D76.1 D92.1 D108.1 D124.1 D140.1 D156.1 D172.1 D188.1 D204.1 D220.1 D236.1 D252.1
Net13_1: 13.1 D13.1 D29.1 D45.1 D61.1 D77.1 D93.1 D109.1 D125.1 D141.1 D157.1 D173.1 D189.1 D205.1 D221.1 D237.1 D253.1 | length 156.9
  Top Layer w0.508: 13.1 D13.1 D29.1 D45.1 D61.1 D77.1 D93.1 D109.1 D125.1 D141.1 D157.1 D173.1 D189.1 D205.1 D221.1 D237.1 D253.1
Net14_1: 14.1 D14.1 D30.1 D46.1 D62.1 D78.1 D94.1 D110.1 D126.1 D142.1 D158.1 D174.1 D190.1 D206.1 D222.1 D238.1 D254.1 | length 156.9
  Top Layer w0.508: 14.1 D14.1 D30.1 D46.1 D62.1 D78.1 D94.1 D110.1 D126.1 D142.1 D158.1 D174.1 D190.1 D206.1 D222.1 D238.1 D254.1
Net15_1: 15.1 D15.1 D31.1 D47.1 D63.1 D79.1 D95.1 D111.1 D127.1 D143.1 D159.1 D175.1 D191.1 D207.1 D223.1 D239.1 D255.1 | length 156.9
  Top Layer w0.508: 15.1 D15.1 D31.1 D47.1 D63.1 D79.1 D95.1 D111.1 D127.1 D143.1 D159.1 D175.1 D191.1 D207.1 D223.1 D239.1 D255.1
Net16_1: 16.1 D16.1 D32.1 D48.1 D64.1 D80.1 D96.1 D112.1 D128.1 D144.1 D160.1 D176.1 D192.1 D208.1 D224.1 D240.1 D256.1 | length 156.9
  Top Layer w0.508: 16.1 D16.1 D32.1 D48.1 D64.1 D80.1 D96.1 D112.1 D128.1 D144.1 D160.1 D176.1 D192.1 D208.1 D224.1 D240.1 D256.1
NetC5_1: C5.1 IC*1.20 | length 2.5
  Top Layer w0.508: IC*1.20 C5.1
NetD1_1: D1.1 D17.1 D33.1 D49.1 D65.1 D81.1 D97.1 D113.1 D129.1 D145.1 D161.1 D177.1 D193.1 D209.1 D225.1 D241.1 R1.1 | length 160.7
  Top Layer w0.508: D241.1 D225.1 D209.1 D193.1 D177.1 D161.1 D145.1 D129.1 D113.1 D97.1 D81.1 D65.1 D49.1 D33.1 D17.1 54.61,228.6 54.61,233.426 D1.1 R1.1
NetD1_2: D1.2 D2.2 D3.2 D4.2 D5.2 D6.2 D7.2 D8.2 D9.2 D10.2 D11.2 D12.2 D13.2 D14.2 D15.2 D16.2 Driver1.10 | length 166.7
  Bottom Layer w0.508: D1.2 59.055,231.775 64.135,231.775 D2.2 67.945,231.775 73.025,231.775 D3.2 76.835,231.775 81.915,231.775 D4.2 85.725,231.775 90.805,231.775 D5.2 94.615,231.775 99.695,231.775 D6.2 103.505,231.775 108.585,231.775 D7.2 112.395,231.775 117.475,231.775 D8.2 121.285,231.775 126.365,231.775 D9.2 130.175,231.775 135.255,231.775 D10.2 139.065,231.775 144.145,231.775 D11.2 147.955,231.775 153.035,231.775 D12.2 156.845,231.775 161.925,231.775 D13.2 165.735,231.775 170.815,231.775 D14.2 174.625,231.775 179.705,231.775 D15.2 183.515,231.775 188.595,231.775 D16.2 190.5,231.14 Driver1.10
NetD2_1: D2.1 D18.1 D34.1 D50.1 D66.1 D82.1 D98.1 D114.1 D130.1 D146.1 D162.1 D178.1 D194.1 D210.1 D226.1 D242.1 R2.1 | length 177.2
  Top Layer w0.508: R2.1 D2.1 D18.1 ; D242.1 D226.1 D210.1 D194.1 D178.1 D162.1 D146.1 D130.1 D114.1 D98.1 D82.1 D66.1 D50.1 ; D50.1 D34.1 ; D50.1 D34.1 ; D34.1 D18.1 ; D34.1 D18.1
NetD3_1: D3.1 D19.1 D35.1 D51.1 D67.1 D83.1 D99.1 D115.1 D131.1 D147.1 D163.1 D179.1 D195.1 D211.1 D227.1 D243.1 R3.1 | length 156.9
  Top Layer w0.508: R3.1 D3.1 D19.1 D35.1 D51.1 D67.1 D83.1 D99.1 D115.1 D131.1 D147.1 D163.1 D179.1 D195.1 D211.1 D227.1 D243.1
NetD4_1: D4.1 D20.1 D36.1 D52.1 D68.1 D84.1 D100.1 D116.1 D132.1 D148.1 D164.1 D180.1 D196.1 D212.1 D228.1 D244.1 R4.1 | length 156.9
  Top Layer w0.508: R4.1 D4.1 D20.1 D36.1 D52.1 D68.1 D84.1 D100.1 D116.1 D132.1 D148.1 D164.1 D180.1 D196.1 D212.1 D228.1 D244.1
NetD17_2: D17.2 D18.2 D19.2 D20.2 D21.2 D22.2 D23.2 D24.2 D25.2 D26.2 D27.2 D28.2 D29.2 D30.2 D31.2 D32.2 Driver1.11 | length 162.1
  Bottom Layer w0.508: D17.2 59.055,225.425 64.135,225.425 D18.2 67.945,225.425 73.025,225.425 D19.2 76.835,225.425 81.915,225.425 D20.2 85.725,225.425 90.805,225.425 D21.2 94.615,225.425 99.695,225.425 D22.2 103.505,225.425 108.585,225.425 D23.2 112.344,225.374 117.526,225.374 D24.2 121.285,225.425 126.365,225.425 D25.2 130.175,225.425 135.255,225.425 D26.2 139.065,225.425 144.145,225.425 D27.2 147.955,225.425 153.035,225.425 D28.2 156.845,225.425 161.925,225.425 D29.2 165.735,225.425 170.815,225.425 D30.2 174.625,225.425 179.705,225.425 D31.2 183.515,225.425 188.595,225.425 D32.2 Driver1.11
NetD33_2: D33.2 D34.2 D35.2 D36.2 D37.2 D38.2 D39.2 D40.2 D41.2 D42.2 D43.2 D44.2 D45.2 D46.2 D47.2 D48.2 Driver1.12 | length 166.7
  Bottom Layer w0.508: D33.2 59.055,215.265 64.135,215.265 D34.2 67.945,215.265 73.025,215.265 D35.2 76.835,215.265 81.915,215.265 D36.2 85.725,215.265 90.805,215.265 D37.2 94.615,215.265 99.695,215.265 D38.2 103.505,215.265 108.585,215.265 D39.2 112.395,215.265 117.475,215.265 D40.2 121.285,215.265 126.365,215.265 D41.2 130.175,215.265 135.255,215.265 D42.2 139.065,215.265 144.145,215.265 D43.2 147.955,215.265 153.035,215.265 D44.2 156.845,215.265 161.925,215.265 D45.2 165.735,215.265 170.815,215.265 D46.2 174.625,215.265 179.705,215.265 D47.2 183.515,215.265 188.595,215.265 D48.2 190.5,215.9 Driver1.12
NetD49_2: D49.2 D50.2 D51.2 D52.2 D53.2 D54.2 D55.2 D56.2 D57.2 D58.2 D59.2 D60.2 D61.2 D62.2 D63.2 D64.2 Driver1.13 | length 174.4
  Bottom Layer w0.508: D49.2 59.055,205.105 64.135,205.105 D50.2 67.945,205.105 73.025,205.105 D51.2 76.835,205.105 81.915,205.105 D52.2 85.725,205.105 90.805,205.105 D53.2 94.615,205.105 99.695,205.105 D54.2 103.505,205.105 108.585,205.105 D55.2 112.395,205.105 117.475,205.105 D56.2 121.285,205.105 126.365,205.105 D57.2 130.175,205.105 135.255,205.105 D58.2 139.065,205.105 144.145,205.105 D59.2 147.955,205.105 153.035,205.105 D60.2 156.845,205.105 161.925,205.105 D61.2 165.735,205.105 170.815,205.105 D62.2 174.625,205.105 179.705,205.105 D63.2 183.515,205.105 188.595,205.105 D64.2 192.405,205.105 192.405,215.265 Driver1.13
NetD65_2: D65.2 D66.2 D67.2 D68.2 D69.2 D70.2 D71.2 D72.2 D73.2 D74.2 D75.2 D76.2 D77.2 D78.2 D79.2 D80.2 Driver2.10 | length 169.2
  Bottom Layer w0.508: D65.2 59.055,194.945 64.135,194.945 D66.2 67.945,194.945 73.025,194.945 D67.2 76.835,194.945 81.915,194.945 D68.2 85.725,194.945 90.805,194.945 D69.2 94.615,194.945 99.695,194.945 D70.2 103.505,194.945 108.585,194.945 D71.2 112.395,194.945 117.475,194.945 D72.2 121.285,194.945 126.365,194.945 D73.2 130.175,194.945 135.255,194.945 D74.2 139.065,194.945 144.145,194.945 D75.2 148.463,195.453 152.527,195.453 D76.2 157.48,195.58 161.29,195.58 D77.2 166.37,195.58 170.18,195.58 D78.2 175.133,195.453 179.197,195.453 D79.2 184.15,195.58 187.96,195.58 D80.2 190.5,190.5 Driver2.10
NetD81_2: D81.2 D82.2 D83.2 D84.2 D85.2 D86.2 D87.2 D88.2 D89.2 D90.2 D91.2 D92.2 D93.2 D94.2 D95.2 D96.2 Driver2.11 | length 162.1
  Bottom Layer w0.508: D81.2 59.055,184.785 64.135,184.785 D82.2 67.945,184.785 73.025,184.785 D83.2 76.835,184.785 81.915,184.785 D84.2 85.725,184.785 90.805,184.785 D85.2 94.615,184.785 99.695,184.785 D86.2 103.505,184.785 108.585,184.785 D87.2 112.37,184.76 117.5,184.76 D88.2 121.285,184.785 126.365,184.785 D89.2 130.175,184.785 135.255,184.785 D90.2 139.065,184.785 144.145,184.785 D91.2 147.955,184.785 153.035,184.785 D92.2 156.845,184.785 161.925,184.785 D93.2 165.735,184.785 170.815,184.785 D94.2 174.625,184.785 179.705,184.785 D95.2 183.515,184.785 188.595,184.785 D96.2 Driver2.11
NetD97_2: D97.2 D98.2 D99.2 D100.2 D101.2 D102.2 D103.2 D104.2 D105.2 D106.2 D107.2 D108.2 D109.2 D110.2 D111.2 D112.2 Driver2.12 | length 166.7
  Bottom Layer w0.508: D97.2 59.055,174.625 64.135,174.625 D98.2 67.945,174.625 73.025,174.625 D99.2 76.835,174.625 81.915,174.625 D100.2 85.725,174.625 90.805,174.625 D101.2 94.615,174.625 99.695,174.625 D102.2 103.505,174.625 108.585,174.625 D103.2 112.395,174.625 117.475,174.625 D104.2 121.285,174.625 126.365,174.625 D105.2 130.175,174.625 135.255,174.625 D106.2 139.065,174.625 144.145,174.625 D107.2 147.955,174.625 153.035,174.625 D108.2 156.845,174.625 161.925,174.625 D109.2 165.735,174.625 170.815,174.625 D110.2 174.625,174.625 179.705,174.625 D111.2 183.515,174.625 188.595,174.625 D112.2 190.5,175.26 Driver2.12
NetD113_2: D113.2 D114.2 D115.2 D116.2 D117.2 D118.2 D119.2 D120.2 D121.2 D122.2 D123.2 D124.2 D125.2 D126.2 D127.2 D128.2 Driver2.13 | length 181.2
  Bottom Layer w0.508: D113.2 59.055,164.465 64.135,164.465 D114.2 67.945,164.465 73.025,164.465 D115.2 77.47,160.02 81.28,160.02 D116.2 86.36,160.02 90.17,160.02 D117.2 95.25,160.02 99.06,160.02 D118.2 104.14,160.02 107.95,160.02 D119.2 113.03,160.02 116.84,160.02 D120.2 121.92,160.02 125.73,160.02 D121.2 130.81,160.02 134.62,160.02 D122.2 139.7,160.02 143.51,160.02 D123.2 148.59,160.02 152.4,160.02 D124.2 157.48,160.02 161.29,160.02 D125.2 166.37,160.02 170.18,160.02 D126.2 175.26,160.02 179.07,160.02 D127.2 184.15,160.02 187.96,160.02 D128.2 192.405,164.465 192.405,174.625 Driver2.13
NetD129_2: D129.2 D130.2 D131.2 D132.2 D133.2 D134.2 D135.2 D136.2 D137.2 D138.2 D139.2 D140.2 D141.2 D142.2 D143.2 D144.2 Driver3.10 | length 174
  Bottom Layer w0.508: D129.2 59.055,154.305 64.135,154.305 D130.2 68.478,154.838 72.492,154.838 D131.2 77.47,149.86 81.28,149.86 D132.2 86.36,149.86 90.17,149.86 D133.2 95.25,149.86 99.06,149.86 D134.2 104.14,149.86 107.95,149.86 D135.2 113.03,149.86 116.84,149.86 D136.2 121.92,149.86 125.73,149.86 D137.2 130.81,149.86 134.62,149.86 D138.2 139.7,149.86 143.51,149.86 D139.2 148.59,149.86 152.4,149.86 D140.2 157.48,149.86 161.29,149.86 D141.2 166.37,149.86 170.18,149.86 D142.2 175.26,149.86 179.07,149.86 D143.2 184.15,149.86 187.96,149.86 D144.2 190.5,149.86 Driver3.10
NetD145_2: D145.2 D146.2 D147.2 D148.2 D149.2 D150.2 D151.2 D152.2 D153.2 D154.2 D155.2 D156.2 D157.2 D158.2 D159.2 D160.2 Driver3.11 | length 161.5
  Bottom Layer w0.508: D145.2 59.055,144.145 64.135,144.145 D146.2 67.64,143.84 73.33,143.84 D147.2 76.835,140.335 81.915,140.335 D148.2 85.725,140.335 90.805,140.335 D149.2 94.615,140.335 99.695,140.335 D150.2 103.378,140.462 108.712,140.462 D151.2 112.395,140.335 117.475,140.335 D152.2 121.285,140.335 126.365,140.335 D153.2 130.175,140.335 135.255,140.335 D154.2 139.065,140.335 144.145,140.335 D155.2 147.955,140.335 153.035,140.335 D156.2 156.718,140.462 162.052,140.462 D157.2 165.735,140.335 170.815,140.335 D158.2 174.498,140.462 179.832,140.462 D159.2 183.515,140.335 188.595,140.335 D160.2 Driver3.11
NetD161_2: D161.2 D162.2 D163.2 D164.2 D165.2 D166.2 D167.2 D168.2 D169.2 D170.2 D171.2 D172.2 D173.2 D174.2 D175.2 D176.2 Driver3.12 | length 166.7
  Bottom Layer w0.508: D161.2 59.055,133.985 64.135,133.985 D162.2 67.945,130.175 73.025,130.175 D163.2 76.835,130.175 81.915,130.175 D164.2 85.725,130.175 90.805,130.175 D165.2 94.615,130.175 99.695,130.175 D166.2 103.505,130.175 108.585,130.175 D167.2 112.395,130.175 117.475,130.175 D168.2 121.285,130.175 126.365,130.175 D169.2 130.175,130.175 135.255,130.175 D170.2 139.065,130.175 144.145,130.175 D171.2 147.955,130.175 153.035,130.175 D172.2 156.845,130.175 161.925,130.175 D173.2 165.735,130.175 170.815,130.175 D174.2 174.625,130.175 179.705,130.175 D175.2 183.515,130.175 188.595,130.175 D176.2 190.5,134.62 Driver3.12
NetD177_2: D177.2 D178.2 D179.2 D180.2 D181.2 D182.2 D183.2 D184.2 D185.2 D186.2 D187.2 D188.2 D189.2 D190.2 D191.2 D192.2 Driver3.13 | length 174.8
  Bottom Layer w0.508: D177.2 59.055,123.825 64.135,123.825 D178.2 68.428,124.308 72.542,124.308 D179.2 76.835,120.015 81.915,120.015 D180.2 85.725,120.015 90.805,120.015 D181.2 94.615,120.015 99.695,120.015 D182.2 103.505,120.015 108.585,120.015 D183.2 112.395,120.015 117.475,120.015 D184.2 121.285,120.015 126.365,120.015 D185.2 130.175,120.015 135.255,120.015 D186.2 139.065,120.015 144.145,120.015 D187.2 147.955,120.015 153.035,120.015 D188.2 156.845,120.015 161.925,120.015 D189.2 165.735,120.015 170.815,120.015 D190.2 174.625,120.015 179.705,120.015 D191.2 183.515,120.015 188.595,120.015 D192.2 192.405,123.825 192.405,133.985 Driver3.13
NetD193_2: D193.2 D194.2 D195.2 D196.2 D197.2 D198.2 D199.2 D200.2 D201.2 D202.2 D203.2 D204.2 D205.2 D206.2 D207.2 D208.2 Driver4.10 | length 166.7
  Bottom Layer w0.508: D193.2 59.055,109.855 64.135,109.855 D194.2 67.945,109.855 73.025,109.855 D195.2 76.835,109.855 81.915,109.855 D196.2 85.725,109.855 90.805,109.855 D197.2 94.615,109.855 99.695,109.855 D198.2 103.505,109.855 108.585,109.855 D199.2 112.395,109.855 117.475,109.855 D200.2 121.285,109.855 126.365,109.855 D201.2 130.175,109.855 135.255,109.855 D202.2 139.065,109.855 144.145,109.855 D203.2 147.955,109.855 153.035,109.855 D204.2 156.845,109.855 161.925,109.855 D205.2 165.735,109.855 170.815,109.855 D206.2 174.625,109.855 179.705,109.855 D207.2 183.515,109.855 188.595,109.855 D208.2 190.5,109.22 Driver4.10
NetD209_2: D209.2 D210.2 D211.2 D212.2 D213.2 D214.2 D215.2 D216.2 D217.2 D218.2 D219.2 D220.2 D221.2 D222.2 D223.2 D224.2 Driver4.11 | length 162.1
  Bottom Layer w0.508: D209.2 59.055,99.695 64.135,99.695 D210.2 67.945,99.695 73.025,99.695 D211.2 76.835,99.695 81.915,99.695 D212.2 85.725,99.695 90.805,99.695 D213.2 94.615,99.695 99.695,99.695 D214.2 103.505,99.695 108.585,99.695 D215.2 112.395,99.695 117.475,99.695 D216.2 121.285,99.695 126.365,99.695 D217.2 130.175,99.695 135.255,99.695 D218.2 139.065,99.695 144.145,99.695 D219.2 147.955,99.695 153.035,99.695 D220.2 156.845,99.695 161.925,99.695 D221.2 165.735,99.695 170.815,99.695 D222.2 174.625,99.695 179.705,99.695 D223.2 183.515,99.695 188.595,99.695 D224.2 Driver4.11
NetD225_2: D225.2 D226.2 D227.2 D228.2 D229.2 D230.2 D231.2 D232.2 D233.2 D234.2 D235.2 D236.2 D237.2 D238.2 D239.2 D240.2 Driver4.12 | length 166.7
  Bottom Layer w0.508: D225.2 59.055,89.535 64.135,89.535 D226.2 67.945,89.535 73.025,89.535 D227.2 76.835,89.535 81.915,89.535 D228.2 85.725,89.535 90.805,89.535 D229.2 94.615,89.535 99.695,89.535 D230.2 103.505,89.535 108.585,89.535 D231.2 112.395,89.535 117.475,89.535 D232.2 121.285,89.535 126.365,89.535 D233.2 130.175,89.535 135.255,89.535 D234.2 139.065,89.535 144.145,89.535 D235.2 147.955,89.535 153.035,89.535 D236.2 156.845,89.535 161.925,89.535 D237.2 165.735,89.535 170.815,89.535 D238.2 174.625,89.535 179.705,89.535 D239.2 183.515,89.535 188.595,89.535 D240.2 190.5,93.98 Driver4.12
NetD241_2: D241.2 D242.2 D243.2 D244.2 D245.2 D246.2 D247.2 D248.2 D249.2 D250.2 D251.2 D252.2 D253.2 D254.2 D255.2 D256.2 Driver4.13 | length 174.9
  Bottom Layer w0.508: D241.2 59.055,79.375 64.135,79.375 D242.2 67.945,79.375 73.025,79.375 D243.2 76.835,79.375 81.915,79.375 D244.2 85.725,79.375 90.805,79.375 D245.2 95.25,78.74 99.06,78.74 D246.2 103.505,79.375 108.585,79.375 D247.2 112.395,79.375 117.475,79.375 D248.2 121.285,79.375 126.365,79.375 D249.2 130.175,79.375 135.255,79.375 D250.2 139.065,79.375 144.145,79.375 D251.2 147.955,79.375 153.035,79.375 D252.2 156.845,79.375 161.925,79.375 D253.2 165.735,79.375 170.815,79.375 D254.2 174.625,79.375 179.705,79.375 D255.2 183.515,79.375 188.595,79.375 D256.2 193.04,83.82 193.04,93.98 Driver4.13
NetDriver1_1: Driver1.1 DémuxBas.5 | length 80.8
  Top Layer w0.508: v1(205.74,160.02) v1(205.74,213.36)
  Bottom Layer w0.508: Driver1.1 v1(205.74,213.36) ; v1(205.74,160.02) 205.74,152.4 208.28,149.86 DémuxBas.5
NetDriver1_3: Driver1.3 DémuxBas.3 | length 79.4
  Top Layer w0.508: v1(210.82,154.94) 210.82,160.02 v1(210.82,213.36)
  Bottom Layer w0.508: Driver1.3 v1(210.82,213.36) ; v1(210.82,154.94) DémuxBas.3
NetDriver1_5: Driver1.5 DémuxBas.4 | length 87.1
  Top Layer w0.508: v1(208.026,160.02) v1(208.026,221.234)
  Bottom Layer w0.508: Driver1.5 v1(208.026,221.234) ; v1(208.026,160.02) 208.026,154.94 210.566,152.4 DémuxBas.4
NetDriver1_8: Driver1.8 DémuxBas.2 | length 94.1
  Top Layer w0.508: v1(209.55,229.235) 209.55,216.659 212.255,213.954 212.255,166.205 v1(213.36,165.1)
  Bottom Layer w0.508: Driver1.8 198.628,234.188 205.232,234.188 209.55,229.87 v1(209.55,229.235) ; v1(213.36,165.1) DémuxBas.2
NetDriver2_1: Driver2.1 DémuxBas.1 | length 24.1
  Bottom Layer w0.508: Driver2.1 205.74,175.26 DémuxBas.1
NetDriver2_3: Driver2.3 DémuxHaut.6 | length 25.1
  Bottom Layer w0.508: Driver2.3 DémuxHaut.6
NetDriver2_5: Driver2.5 DémuxHaut.5 | length 27.7
  Bottom Layer w0.508: Driver2.5 205.74,182.88 205.74,180.34 DémuxHaut.5
NetDriver2_8: Driver2.8 DémuxHaut.4 | length 42.7
  Bottom Layer w0.508: Driver2.8 198.755,193.675 203.835,193.675 207.645,189.865 207.645,180.975 DémuxHaut.4
NetDriver3_1: Driver3.1 DémuxBas.11 | length 41.8
  Bottom Layer w0.508: Driver3.1 217.551,134.62 225.425,142.494 225.425,154.305 DémuxBas.11
NetDriver3_3: Driver3.3 DémuxBas.12 | length 41.2
  Bottom Layer w0.508: Driver3.3 220.853,139.7 224.536,143.383 224.536,155.956 DémuxBas.12
NetDriver3_5: Driver3.5 DémuxHaut.8 | length 41.3
  Bottom Layer w0.508: Driver3.5 221.107,144.78 223.647,147.32 223.647,160.147 DémuxHaut.8
NetDriver3_8: Driver3.8 DémuxHaut.7 | length 63.6
  Top Layer w0.508: v1(202.565,156.845) 215.9,143.51 228.854,143.51 232.156,146.812 v1(232.156,159.004)
  Bottom Layer w0.508: Driver3.8 v1(202.565,156.845) ; DémuxHaut.7 v1(232.156,159.004)
NetDriver4_1: Driver4.1 DémuxBas.8 | length 68.5
  Bottom Layer w0.508: Driver4.1 231.14,121.92 231.14,147.32 DémuxBas.8
NetDriver4_3: Driver4.3 DémuxBas.7 | length 58.8
  Bottom Layer w0.508: Driver4.3 228.6,124.46 DémuxBas.7
NetDriver4_5: Driver4.5 DémuxBas.9 | length 58.8
  Bottom Layer w0.508: Driver4.5 227.203,128.143 227.203,151.003 DémuxBas.9
NetDriver4_8: Driver4.8 DémuxBas.10 | length 59.4
  Bottom Layer w0.508: Driver4.8 226.314,139.954 226.314,152.654 DémuxBas.10
NetDémuxHaut_2: DémuxHaut.2 IC*1.22 | length 227.1
  Top Layer w0.508: DémuxHaut.2 220.98,173.875 219.967,173.875 219.595,174.247 219.595,180.225 v2(236.22,196.85)
  Bottom Layer w0.508: 104.14,268.605 IC*1.22 107.315,264.16 224.155,264.16 236.22,252.095 v2(236.22,196.85)
NetDémuxHaut_3: DémuxHaut.3 IC*1.23 | length 227
  Top Layer w0.508: DémuxHaut.3 220.98,171.335 220.406,171.335 218.706,173.035 218.706,182.511 v2(233.045,196.85)
  Bottom Layer w0.508: 101.6,268.605 IC*1.23 105.41,263.525 106.693,263.525 106.947,263.271 219.964,263.271 233.045,250.19 v2(233.045,196.85)
NetDémuxHaut_9: DémuxHaut.9 IC*1.25 | length 251.4
  Top Layer w0.508: IC*1.25 99.06,269.875 v2(99.06,271.78)
  Bottom Layer w0.508: v2(99.06,271.78) 100.439,271.78 101.328,272.669 226.314,272.669 226.695,273.05 242.57,257.175 242.57,181.61 DémuxHaut.9
NetDémuxHaut_10: DémuxHaut.10 IC*1.24 | length 239.3
  Top Layer w0.508: IC*1.24 101.6,269.875 v2(101.6,271.145)
  Bottom Layer w0.508: v2(101.6,271.145) 104.14,271.145 104.775,271.78 222.885,271.78 239.395,255.27 239.395,180.975 DémuxHaut.10
PGC: IC*1.5 PGC.1 pickit.5 | length 45.2
  Top Layer w0.508: pickit.5 81.861,272.415 88.326,265.95 90.285,265.95 94.246,261.989 94.922,261.989 95.811,261.1 97.094,261.1 97.905,260.289 97.905,259.715 IC*1.5 99.06,257.175 PGC.1
PGD: IC*1.4 PGD.1 pickit.4 | length 41.9
  Top Layer w0.508: pickit.4 71.64,261.1 94.554,261.1 95.365,260.289 95.365,259.715 IC*1.4 95.25,258.445 PGD.1
RA0: IC*1.2 R1.2 | length 38.9
  Top Layer w0.508: R1.2 57.15,257.175 88.9,257.175 IC*1.2
RA1: IC*1.3 R2.2 | length 37.9
  Top Layer w0.508: R2.2 66.04,255.27 89.535,255.27 IC*1.3
RA2: 7.2 IC*1.9 | length 12
  Top Layer w0.508: 7.2 104.775,255.27 IC*1.9
RA3: 8.2 IC*1.10 | length 10.9
  Top Layer w0.508: IC*1.10 111.76,251.46 8.2
RA4: 10.2 IC*1.12 | length 18.8
  Top Layer w0.508: IC*1.12 127,249.555 10.2
RB0: PGD.2 R3.2 | length 27.9
  Top Layer w0.508: R3.2 73.66,254 PGD.2
RB1: PGC.2 R4.2 | length 22.2
  Top Layer w0.508: R4.2 80.645,252.095 96.52,252.095 PGC.2
RB2: 5.2 IC*1.6 | length 22.9
  Top Layer w0.508: 5.2 92.71,249.555 94.045,250.89 99.76,250.89 101.6,252.73 IC*1.6
RB3: 6.2 IC*1.7 | length 16.9
  Top Layer w0.508: 6.2 101.6,249.555 103.505,251.46 103.505,259.08 IC*1.7
RB4: 9.2 IC*1.11 | length 13.6
  Top Layer w0.508: IC*1.11 122.555,251.46 9.2
RB5: 11.2 IC*1.14 | length 22.6
  Top Layer w0.508: IC*1.14 130.175,259.715 137.16,252.73 11.2
RB6: 12.2 IC*1.15 | length 34.7
  Top Layer w0.508: IC*1.15 131.445,267.335 12.2
RB7: 13.2 IC*1.16 | length 47.2
  Top Layer w0.508: IC*1.16 120.765,268.72 138.95,268.72 13.2
RB8: 14.2 IC*1.17 | length 59.8
  Top Layer w0.508: IC*1.17 119.634,270.129 146.431,270.129 14.2
RB9: 15.2 IC*1.18 | length 72.6
  Top Layer w0.508: IC*1.18 118.745,271.78 153.67,271.78 15.2
RB10: 16.2 IC*1.21 | length 91.7
  Top Layer w0.508: IC*1.21 106.68,269.875 109.855,273.05 161.29,273.05 16.2
pads on no net: DémuxHaut.1 DémuxHaut.11 IC*1.26